# Altium PCB PCB_Final.PcbDoc
Units mm, origin at the board's own origin, x right, y up, seen from the top; angles counter-clockwise.
Board outline 50 x 35 mm, 4 copper layers (Top Layer, Internal Plane 1, Internal Plane 2, Bottom Layer), stack 0.462 mm thick; 10 components, 9 nets, 27 pads, 0 vias.
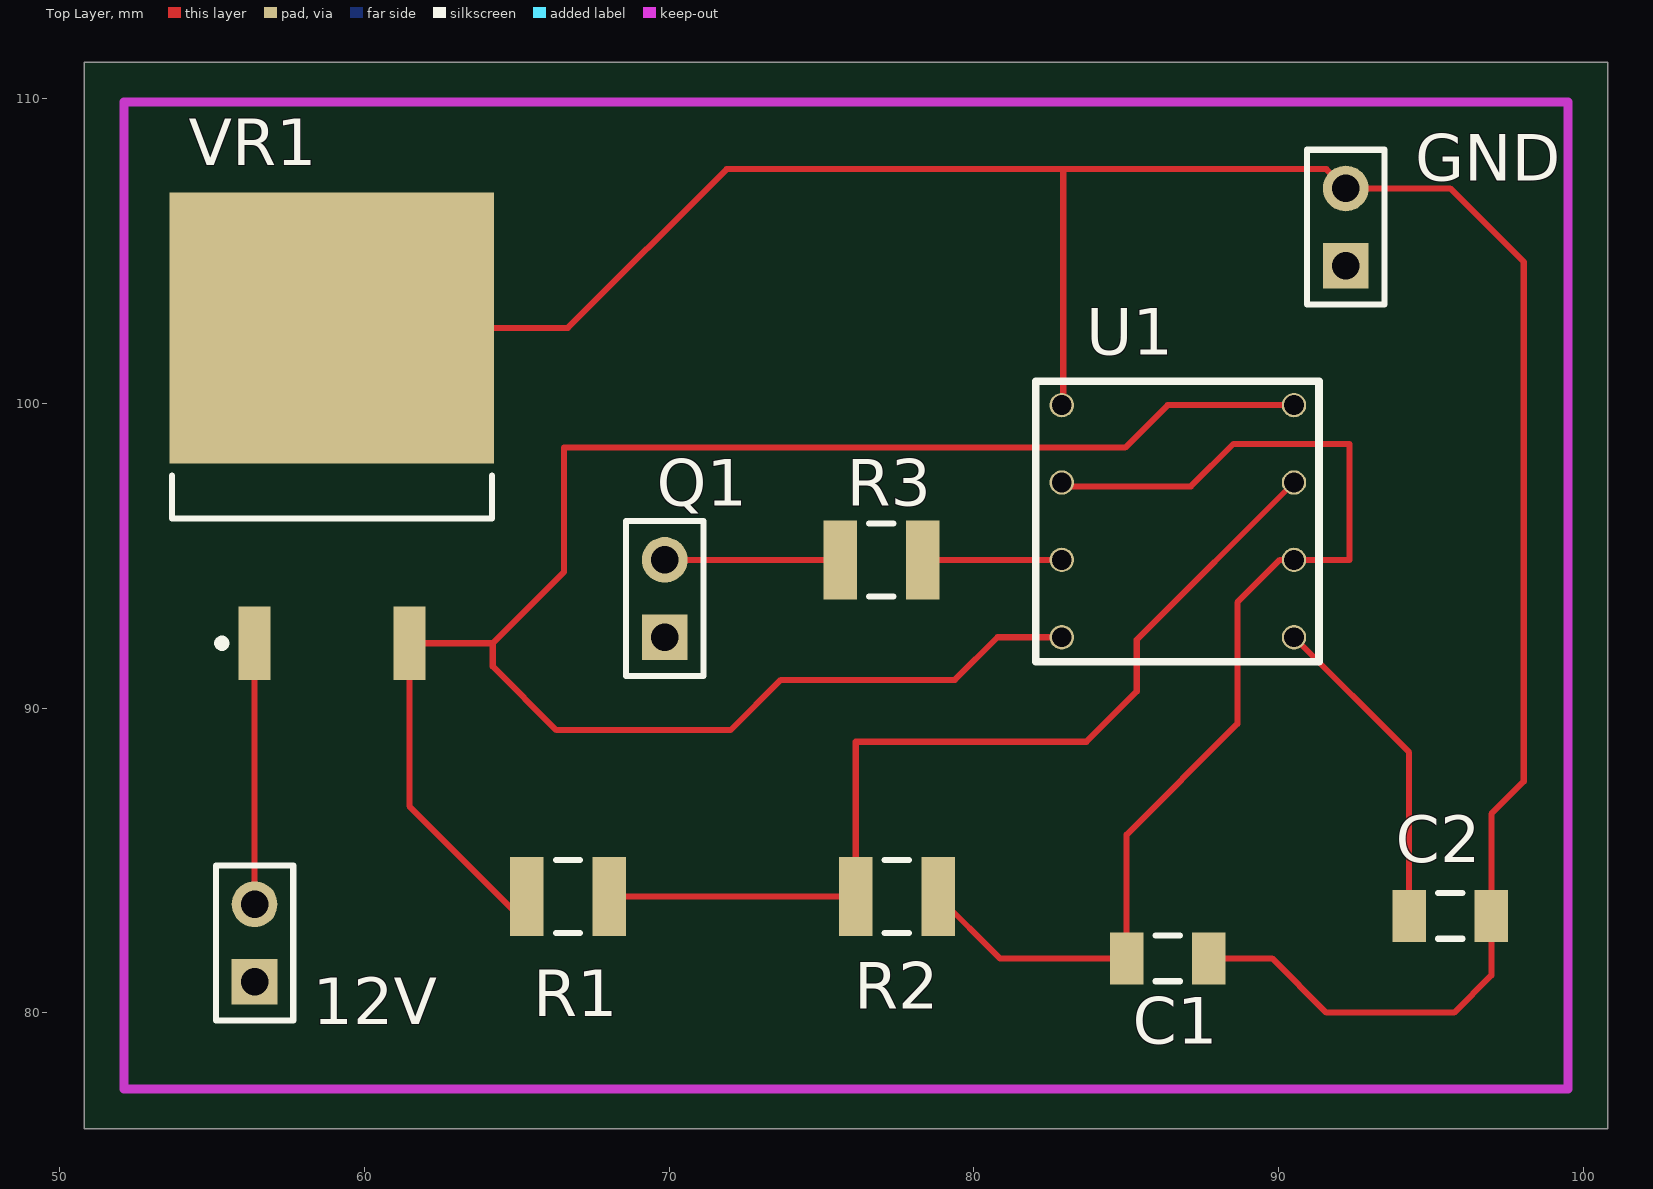
[diagram p0: Top Layer view]
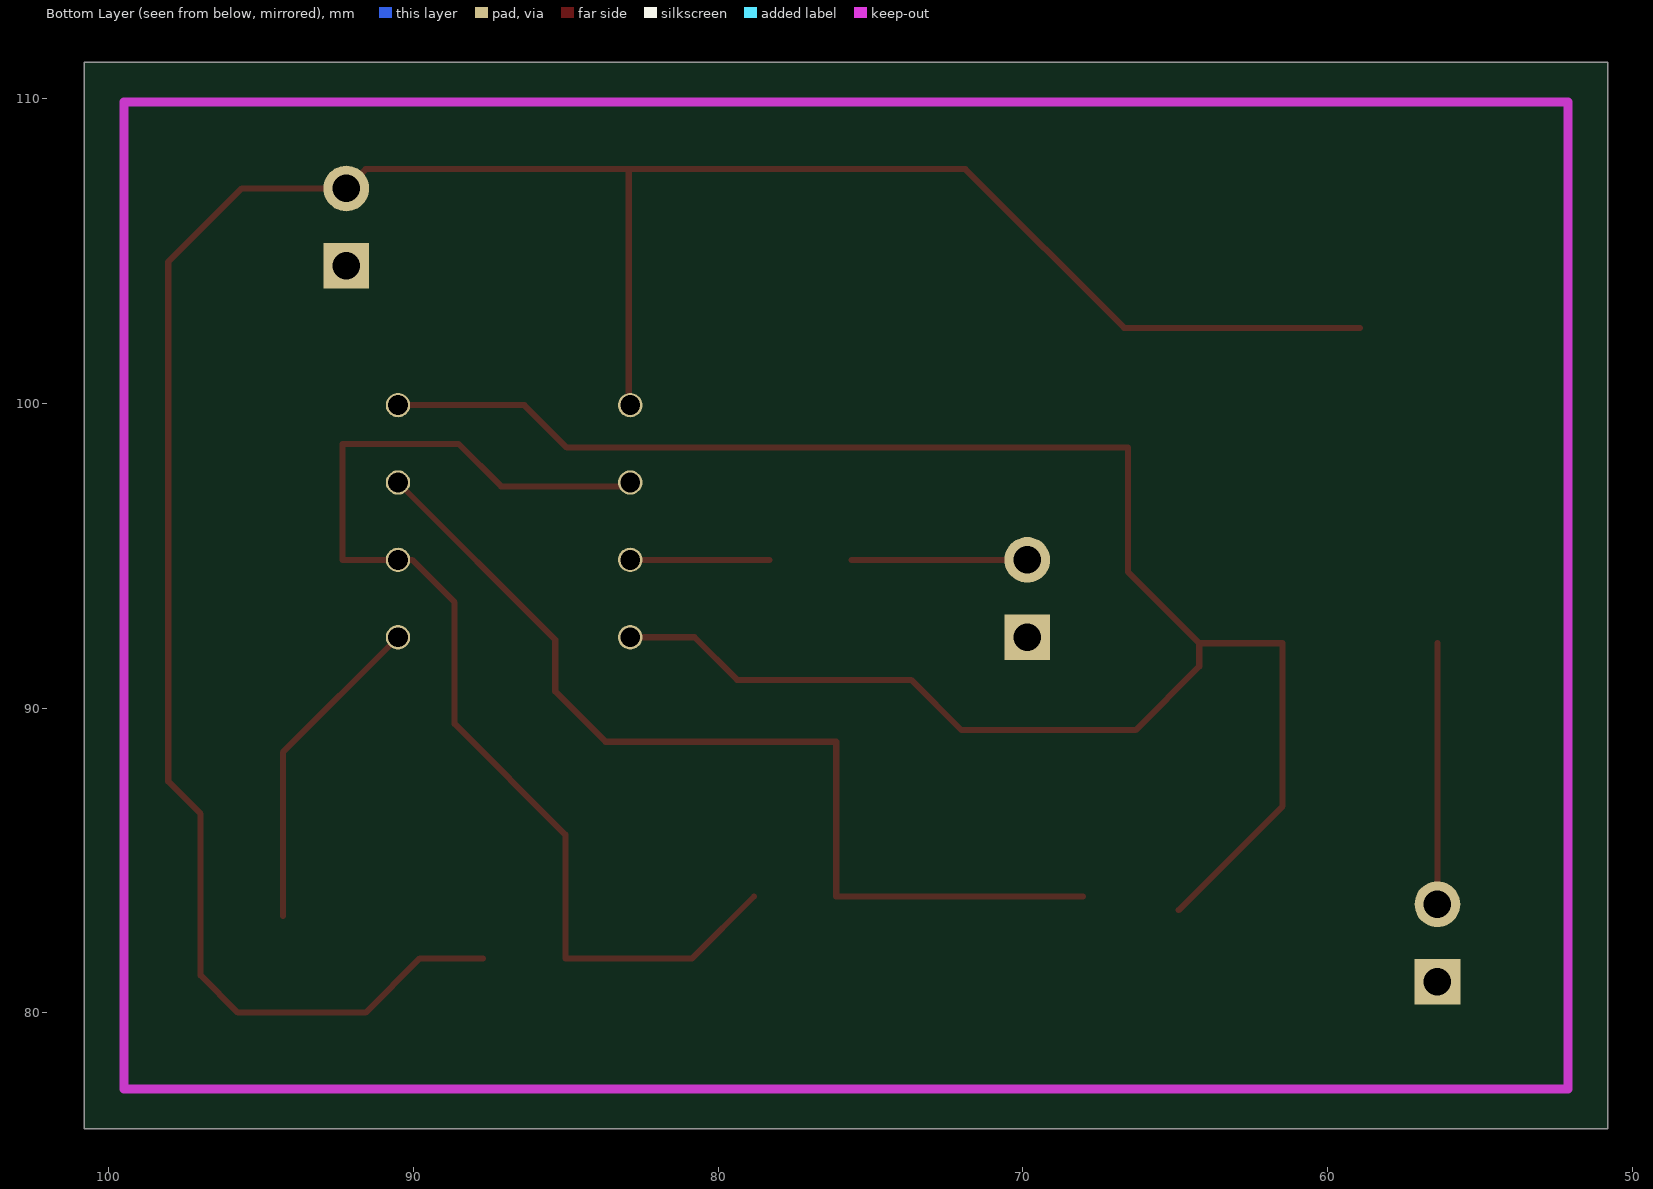
[diagram p1: Bottom Layer view, seen from below]
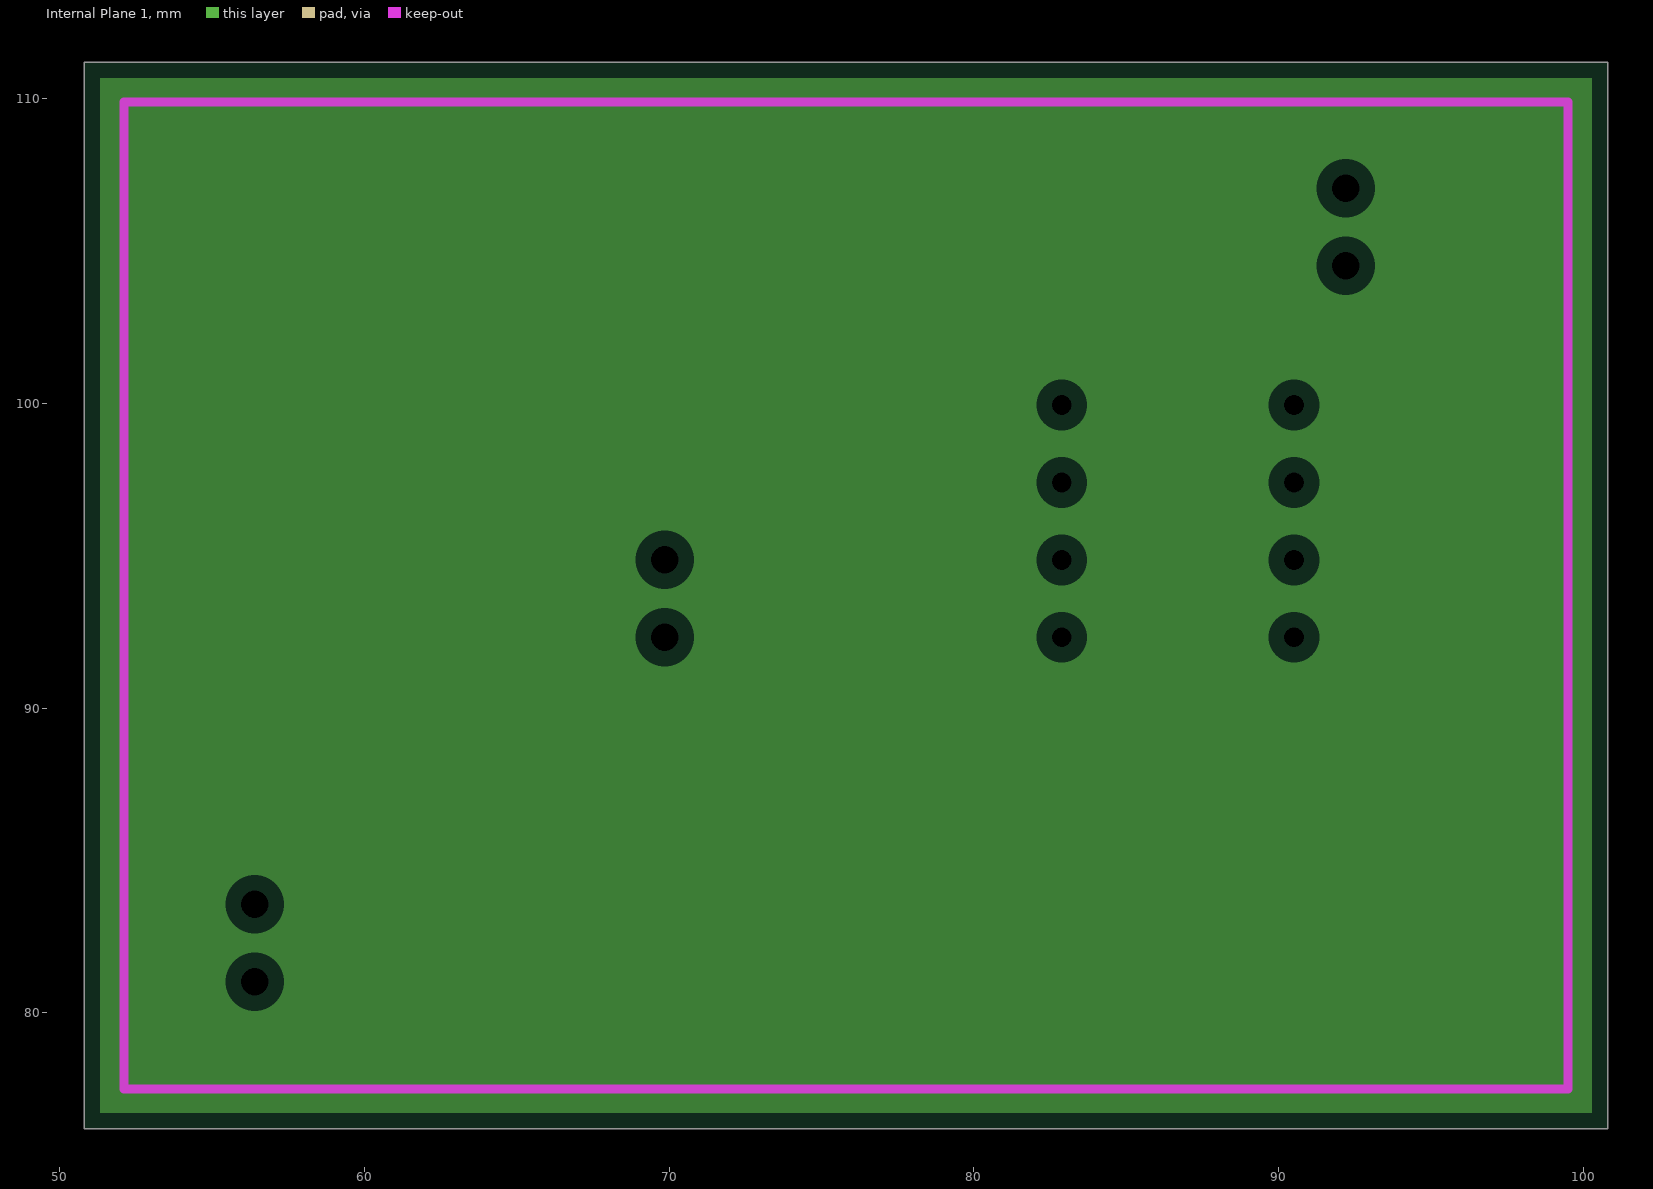
[diagram p2: Internal Plane 1, clearances drawn from the general rule]
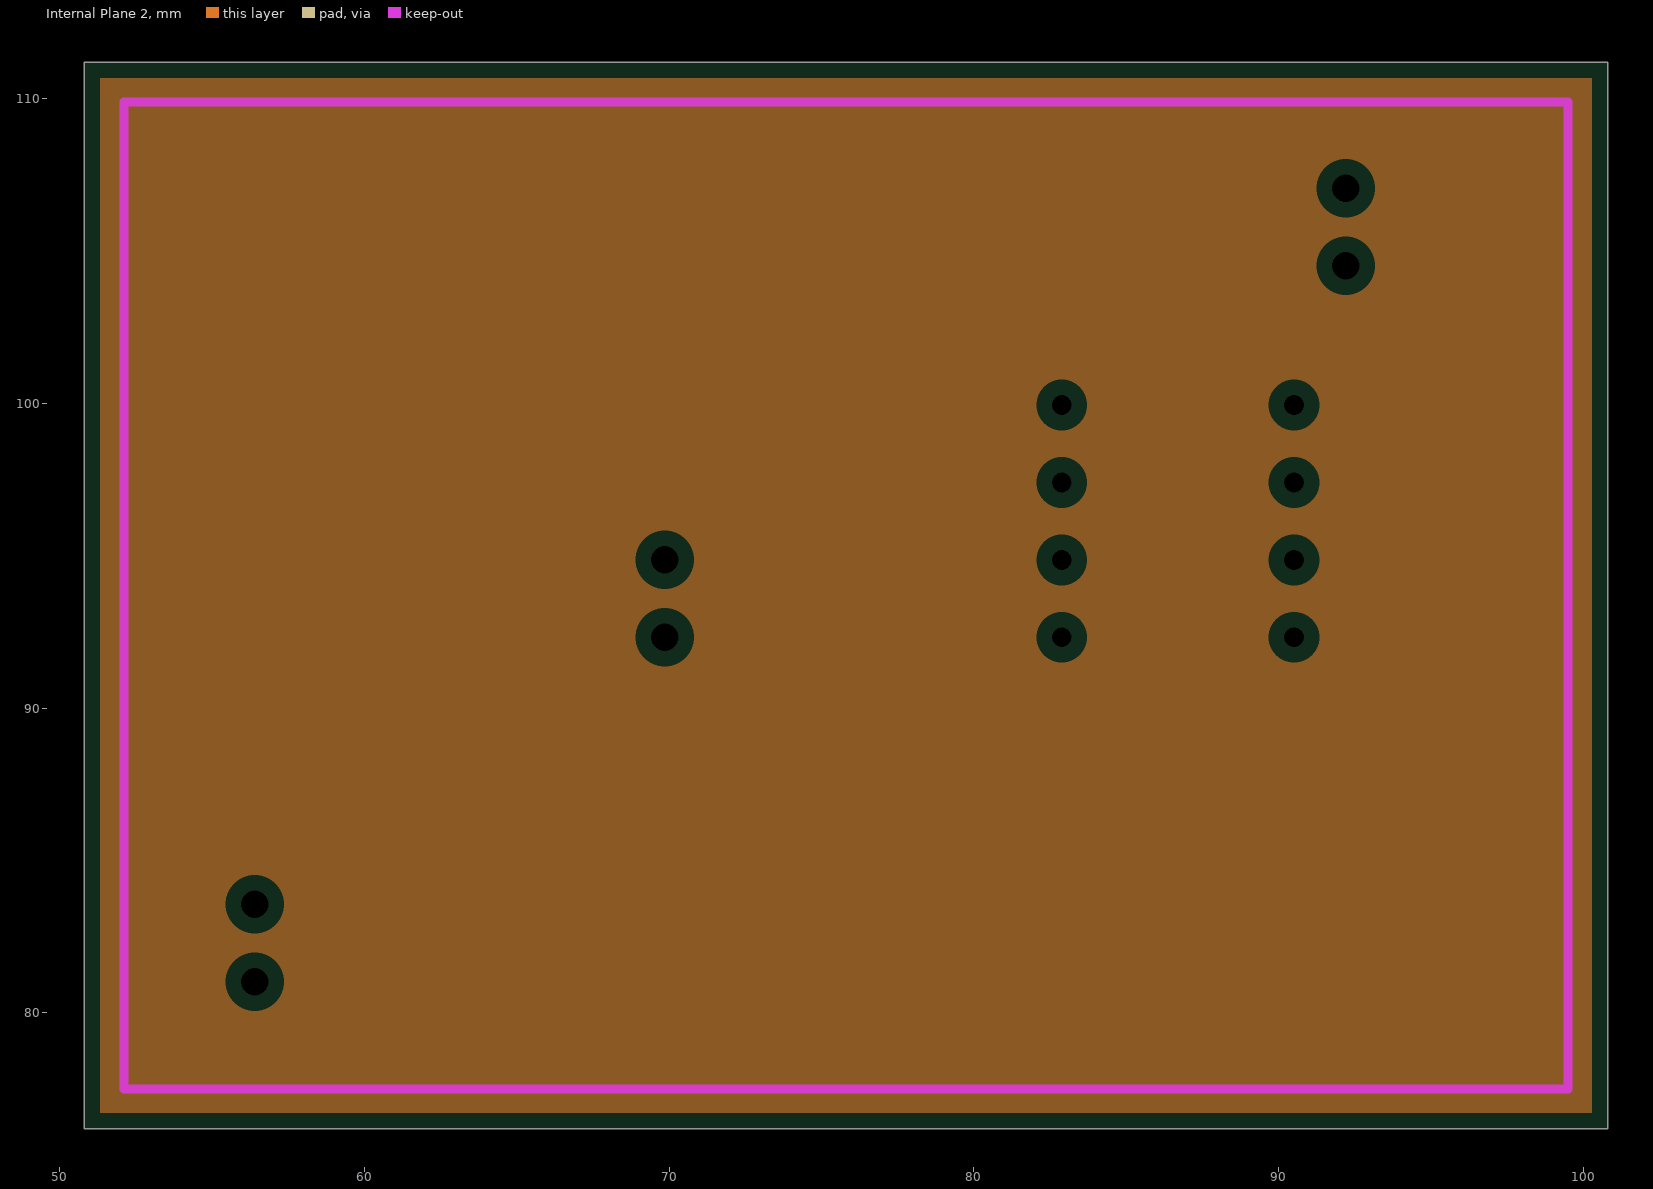
[diagram p3: Internal Plane 2, clearances drawn from the general rule]

## Layer stack, top to bottom
Top Solder: solder mask 0.0102, Solder Resist, Dk 3.5
Top Layer: signal copper 0.0356
Internal Plane 1: plane copper 0.0356
Internal Plane 2: plane copper 0.0356
Dielectric 1: dielectric 0.32, FR-4, Dk 4.8
Bottom Layer: signal copper 0.0356
Bottom Solder: solder mask 0.0102, Solder Resist, Dk 3.5

## Board outline
50.8,76.2 100.8,76.2 100.8,111.2 50.8,111.2

## Design rules (kind name [scope] priority, off if disabled: settings)
Clearance [All] p1: gap=0.2
PlaneClearance [All] p1: clearance=0.508
PlaneConnect [All] p1: planeconnectstyle=Relief reliefexpansion=0.508 reliefentries=4 reliefconductorwidth=0.254 reliefairgap=0.254
PolygonConnect [All] p1: connectstyle=Relief reliefconductorwidth=0.254 reliefentries=4 polygonreliefangle="90 Angle" airgapwidth=0.254
RoutingVias [All] p1: holewidth=0.6 width=1 viastyle="Through Hole" minholewidth=0.711 minwidth=1.27 maxholewidth=0.711 maxwidth=1.27
SolderMaskExpansion [All] p1: expansion=0.102
UnpouredPolygon [All] p1: allowunpoured=FALSE
Width [All] p1: maxlimit=0.2 minlimit=0.2 preferedwidth=0.2
27 further rules are at their usual default settings.

## Classes and differential pairs
component class Blinker_Circuit_2: 12V C1 C2 GND Q1 R1 R2 R3 VR1

## Components (designator, comment, footprint, x,y, rotation, side; value= is the part's Value field where it differs from the comment)
12V "Header 2" HDR1X2 56.388,81.026 r90 top (schematic designator P1)
C1 "Cap Semi" C1206 86.36,81.788 r0 top
C2 "Cap Semi" C1206 95.631,83.185 r0 top
GND "Header 2" HDR1X2 92.202,104.521 r90 top (schematic designator P3)
Q1 "Header 2" HDR1X2 69.85,92.329 r90 top (schematic designator P2)
R1 "Res3" 14-1210 66.675,83.82 r0 top
R2 "Res3" 14-1210 77.47,83.82 r0 top
R3 "Res3" 14-1210 76.962,94.869 r0 top
U1 "Component_2" 555 1317.324,1324.229 r0 top
VR1 "Voltage Regulator" D2PAK_N 58.928,98.933 r90 top

## Footprints (in the part's own frame and the unit in brackets; to place one, negate y for a bottom-side part, rotate by r counter-clockwise, add the part's x,y. Pads: shape width x height; smd on the part's side, far side on the other; paste and mask are expansions set on the pad)
14-1210 [mm] "Chip Resistor, Body 3.2x2.5mm, IPC High Density"
  rect 1.1x2.6 smd: 1(-1.35,0) 2(1.35,0)
  silkscreen extent -0.4,-1.2 0.4,1.2, body extent -1.68,-1.32 1.68,1.32, height 0.9
555 [mm]
  round 0.8 hole 0.65: 1(-1234.44,-1231.9) 1(-1234.44,-1229.36) 1(-1234.44,-1226.82) 1(-1234.44,-1224.28) 1(-1226.82,-1231.9) 1(-1226.82,-1229.36) 1(-1226.82,-1226.82) 1(-1226.82,-1224.28)
  silkscreen extent -1235.3,-1232.7 -1226,-1223.5
C1206 [mm] "Chip Capacitor, Body 3.2x1.6mm, IPC High Density"
  rect 1.1x1.7 smd: 1(-1.35,0) 2(1.35,0)
  silkscreen extent -0.4,-0.75 0.4,0.75, body extent -1.7,-0.9 1.7,0.9, height 1.3
D2PAK_N [mm] "D2-PAK, 4-Leads, Body 8.8x10.4mm, Pitch 2.54mm, Lead Span 15.1mm, IPC Medium Density"
  rect 2.4x1.05 smd: 1(-6.8,2.54) 3(-6.8,-2.54)
  rect 8.9x10.65 smd: 2(3.55,0)
  silkscreen extent -6.92,-5.25 -1.3,5.25, body extent -2.7,-5.28 6.3,5.28, height 4.69
HDR1X2 [mm] "Connector; Header; 2 Position"
  rect 1.5x1.5 hole 0.9: 1(0,0)
  round 1.5 hole 0.9: 2(2.54,0)
  silkscreen extent -1.27,-1.27 3.81,1.27

## Part data
12V GND Q1: "Header, 2-Pin"
C1 C2: "Capacitor (Semiconductor SIM Model)"
R1 R2 R3: "Resistor"
VR1: library part "Volt Reg"

## Nets (pads, with @x,y where several pads share a name; then routed paths per layer and width w, separated by ;. In a path a pad name is that pad's centre, name@x,y a point inside that pad or via, vN(x,y) a via of type N, cw(c..) or ccw(c..) an arc to the next point about the centre after c; other vN are vias at no path point)
5V: R1.1 U1.1@82.884,92.329 U1.1@90.504,99.949 VR1.3 | length 66.4
  Top Layer w0.2: R1.1@64.881,83.376 61.468,86.788 VR1.3 64.204,92.133 ; U1.1@82.884,92.329 80.772,92.329 79.375,90.932 73.66,90.932 72.009,89.281 66.294,89.281 64.204,91.371 64.204,92.133 ; U1.1@90.504,99.949 86.36,99.949 84.963,98.552 66.548,98.552 66.548,94.477 64.204,92.133
GND: C1.2 C2.2 GND.2 U1.1@82.884,99.949 VR1.2 | length 84.7
  Top Layer w0.2: VR1.2 66.669,102.483 71.882,107.696 82.931,107.696 ; U1.1@82.884,99.949 82.931,99.996 82.931,107.696 ; C1.2 89.789,81.788 91.567,80.01 95.758,80.01 96.981,81.233 C2.2 96.981,86.534 98.044,87.597 98.044,104.648 95.631,107.061 GND.2 91.567,107.696 82.931,107.696
NetC1_2: C1.1 R2.2 U1.1@82.884,97.409 U1.1@90.504,94.869 | length 38.4
  Top Layer w0.2: R2.2 80.852,81.788 C1.1 85.01,85.852 88.646,89.488 88.646,93.472 90.043,94.869 90.504,94.869 92.329,94.869 92.329,98.679 88.519,98.679 87.122,97.282 83.011,97.282 U1.1@82.884,97.409
NetC2_1: C2.1 U1.1@90.504,92.329 | length 10.7
  Top Layer w0.2: U1.1@90.504,92.329 94.281,88.552 C2.1
NetP1_2: 12V.2 VR1.1 | length 8.6
  Top Layer w0.2: 12V.2 VR1.1
NetP2_2: Q1.2 R3.1 | length 5.8
  Top Layer w0.2: Q1.2 R3.1
NetR1_1: R1.2 R2.1 U1.1@90.504,97.409 | length 32.1
  Top Layer w0.2: R1.2 R2.1 76.12,88.9 83.693,88.9 85.344,90.551 85.344,92.249 U1.1@90.504,97.409
NetR3_2: R3.2 U1.1@82.884,94.869 | length 4.6
  Top Layer w0.2: R3.2 U1.1@82.884,94.869
"VCC (12V)": 12V.1
pads on no net: GND.1 Q1.1

## Keep-outs
Keep-Out Layer:
  lines w0.3: 52.1,77.5 99.5,77.5 99.5,109.9 52.1,109.9 52.1,77.5

## Dimensions
52.1,77.5 to 99.5,77.5 on Mechanical 1
52.1,77.5 to 52.1,109.9 on Mechanical 1